# EAGLE board qPCR_pcb_breakout_SN74LVC1G04DBVR (EAGLE 9.6.1)
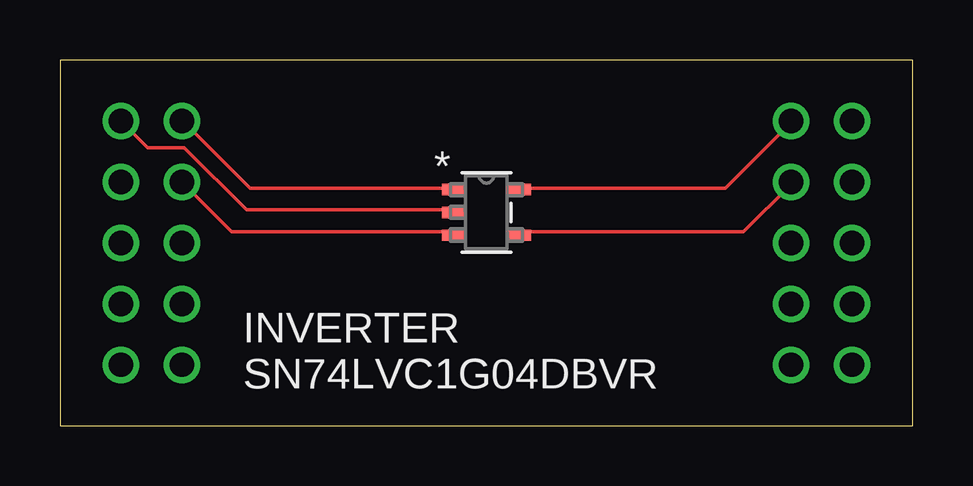
[diagram p0: board, top side]
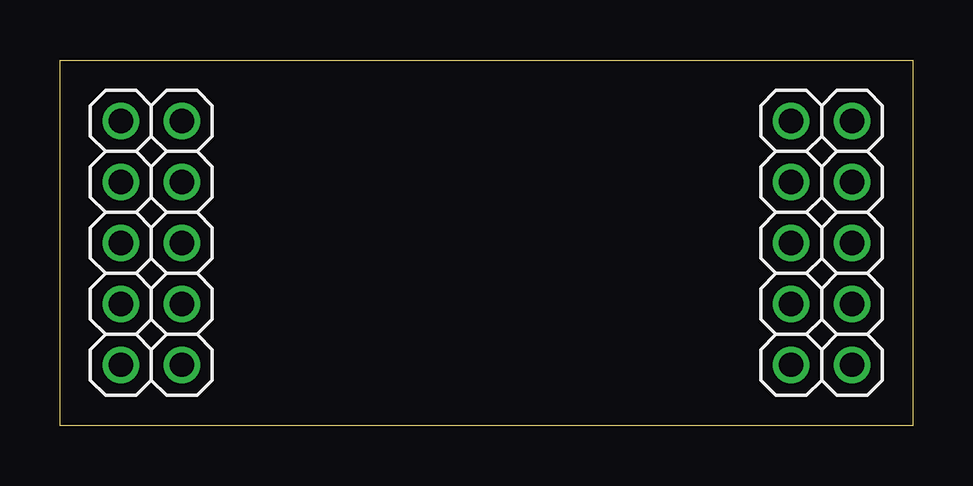
[diagram p1: board, bottom side, seen from below]

Size 35.56 x 15.24 mm. Coordinates in mm from the lower left corner, seen from the top.
Outline: 0,0 35.56,0 35.56,15.24 0,15.24 0,0
Copper layers (1*16): Top 0.035mm / dielectric 1.5mm / Bottom 0.035mm
Design rules "default": minimum track width 6mil, minimum drill 0.35mm, track to track 6mil, track to pad 6mil, pad to pad 6mil, via to via 6mil, smd to smd 6mil, copper to edge 40mil, drill to drill 6mil, minimum pad ring 10mil, minimum via ring 8mil, stop-mask expansion 4mil, vias tented up to drill 0mil, thermal gap 10mil

## Footprints (pad centres in the part's own frame; a part is rotated, then mirrored left to right if it is on the bottom)
1X05R = drill 1.016: 1 -5.08,0; 2 -2.54,0; 3 0,0; 4 2.54,0; 5 5.08,0
DBV5 = smd 0.972 x 0.468: 1 -1.362,0.95; 2 -1.362,0; 3 -1.362,-0.95; 4 1.362,-0.95; 5 1.362,0.95

## Placement (x,y rotation side)
JP1  [1X05R]  2.54,7.62 270 bottom
JP2  [1X05R]  5.08,7.62 270 bottom
JP3  [1X05R]  30.48,7.62 270 bottom
JP4  [1X05R]  33.02,7.62 270 bottom
U1  SN74LVC1G04DBVR  [DBV5]  17.78,8.89 0 top

## Library data of the parts
JP1-JP4 = pinhead
U1 = Ninja_qPCR; DATASHEET_URL: http://www.ti.com/lit/gpn/SN74LVC1G04; DESCRIPTION: Single Inverter; FAMILY_NAME: LL INVERTER; GENERIC_PART_NUMBER: SN74LVC1G04; INDUSTRY_STD_PKG_TYPE: SOT-23; MANUFACTURER: Texas Instruments; MANUFACTURER_PART_NUMBER: SN74LVC1G04DBVR; PACKAGE_DESIGNATOR: DBV; PIN_COUNT: 5; VENDOR: Texas Instruments

## Nets
1: JP2.1 U1.1
2: JP1.1 U1.2
3: JP2.2 U1.3
4: JP1.2
5: JP2.3
6: JP1.3
7: JP2.4
8: JP1.4
9: JP2.5
10: JP1.5
11: JP4.5
12: JP3.5
13: JP4.4
14: JP3.4
15: JP4.3
16: JP3.3
17: JP4.2
18: JP3.2 U1.4
19: JP4.1
20: JP3.1 U1.5

## Tracks (layer width: path | path; a pad name or v marks a point on that pad's centre or on a via)
1
  Top 0.152: U1.1 16.31,9.91 7.92,9.91 5.18,12.65 JP2.1
2
  Top 0.152: JP1.1 3.66,11.58 5.18,11.58 7.77,8.99 16.31,8.99 U1.2
3
  Top 0.152: JP2.2 7.16,8.08 16.31,8.08 U1.3
18
  Top 0.152: U1.4 19.2,8.08 28.5,8.08 30.48,10.06 JP3.2
20
  Top 0.152: U1.5 19.2,9.91 27.74,9.91 30.48,12.65 JP3.1

## Text on the board
tPlace: INVERTER / SN74LVC1G04DBVR